# Altium PCB 电源板.PcbDoc
Units mm, origin at the board's own origin, x right, y up, seen from the top; angles counter-clockwise.
Board outline 72.29 x 60.99 mm, 2 copper layers (Top Layer, Bottom Layer), stack 1.18 mm thick; 16 components, 8 nets, 55 pads, 19 vias.
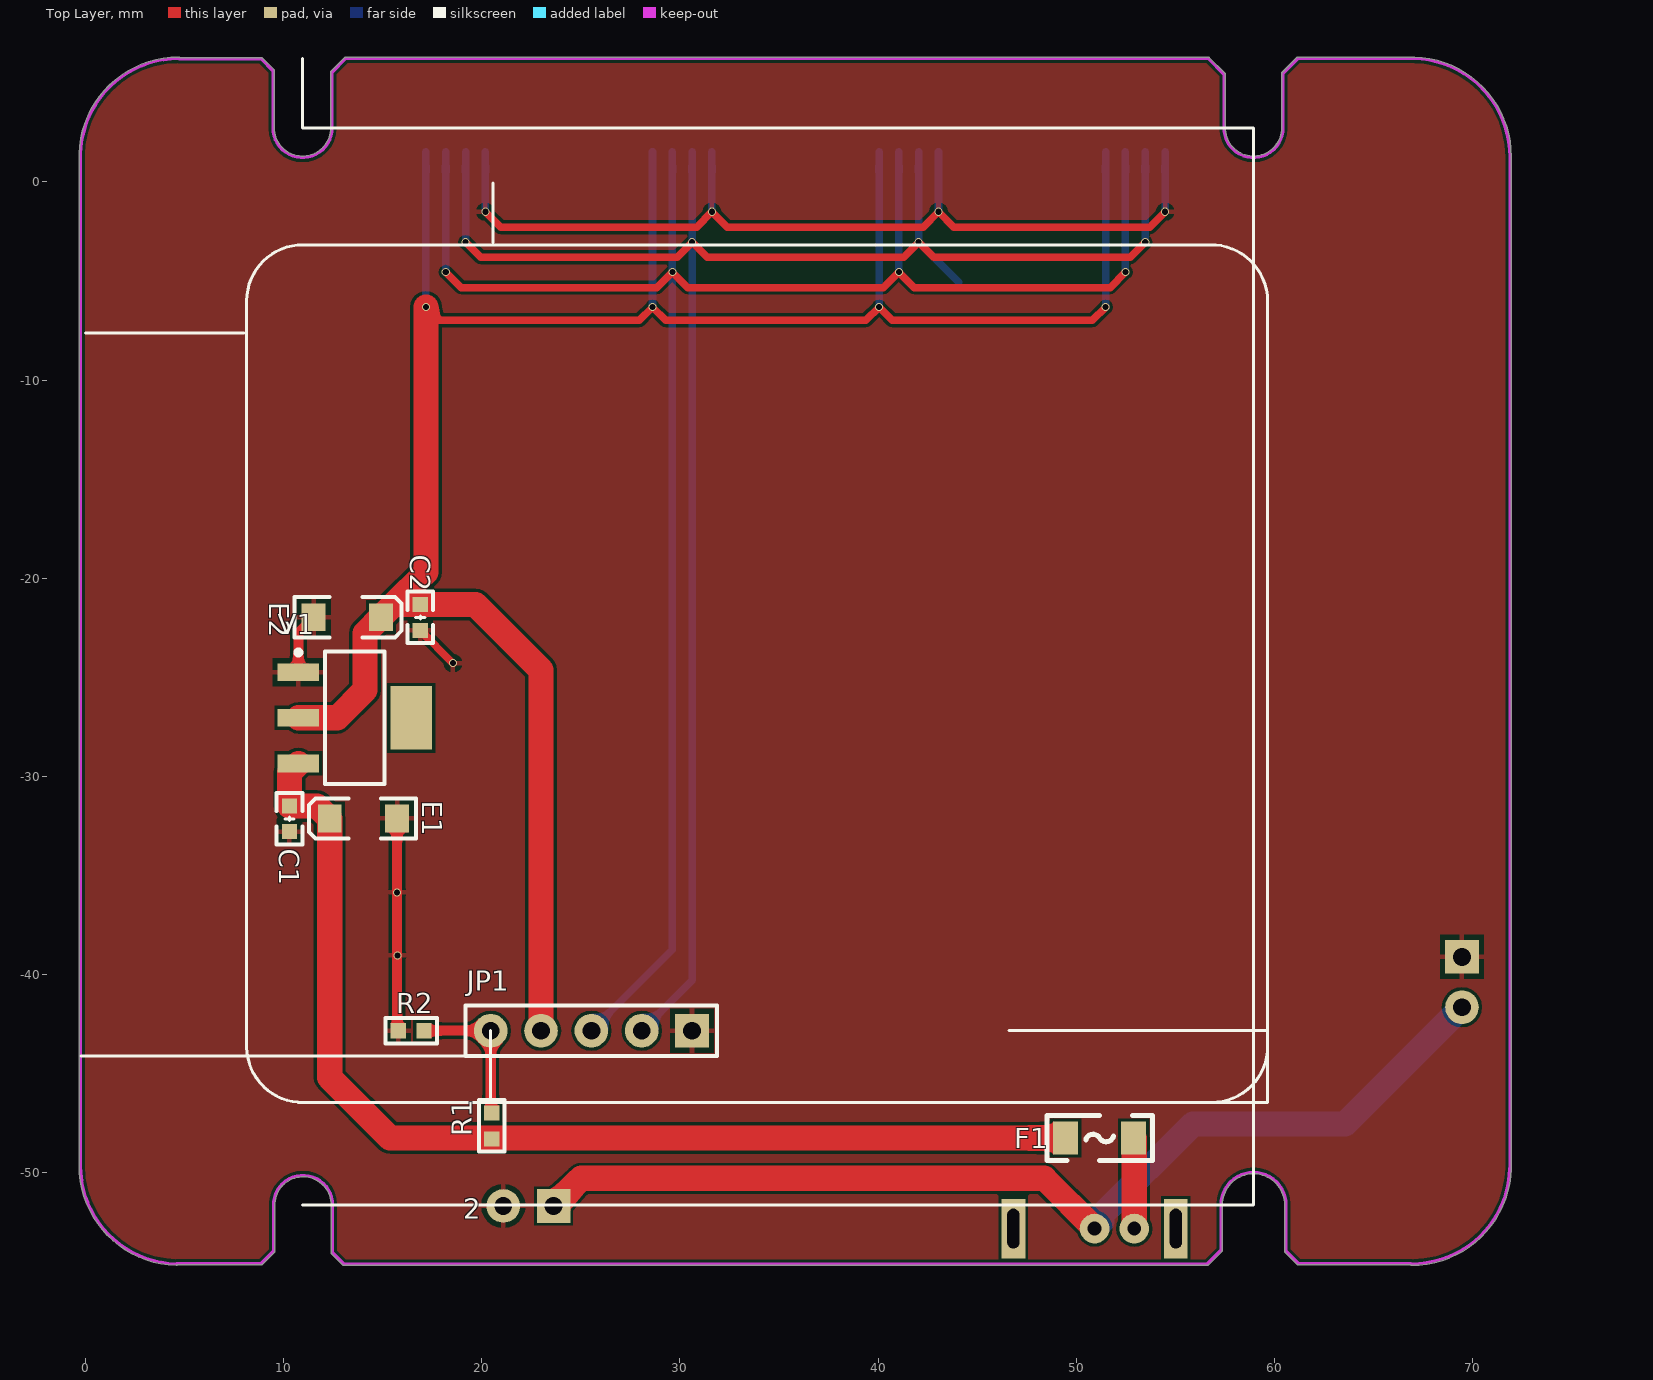
[diagram p0: Top Layer view]
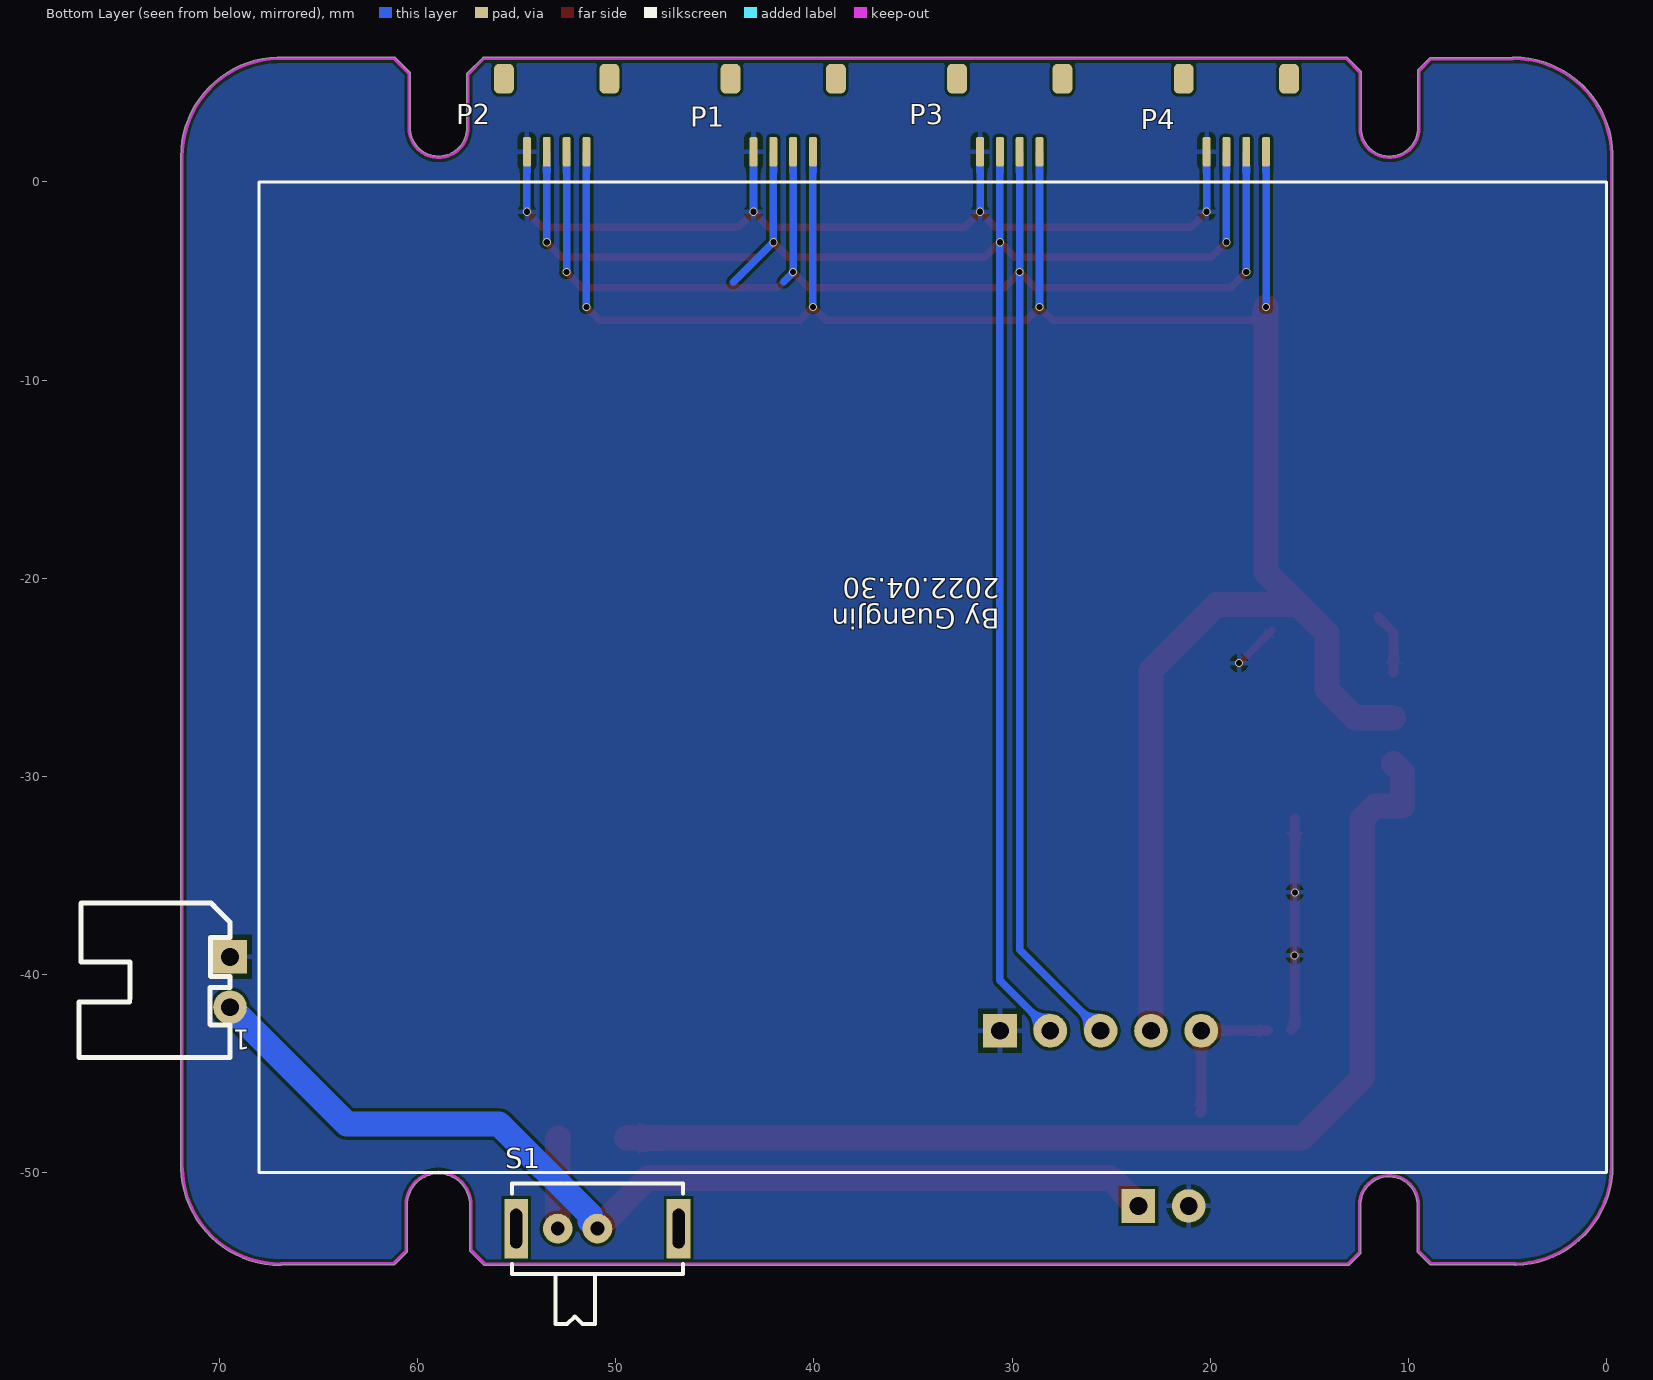
[diagram p1: Bottom Layer view, seen from below]

## Layer stack, top to bottom
Top Solder: solder mask 0.01, Solder Resist, Dk 3.5
Top Layer: signal copper 0.03
Dielectric 1: dielectric 1.12, FR-4, Dk 4.8
Bottom Layer: signal copper 0.03
Bottom Solder: solder mask 0.01, Solder Resist, Dk 3.5

## Board outline
4.57,-54.685 ccw(c4.572,-54.608) 4.628,-54.661 8.865,-54.661 ccw(c8.865,-54.585) 8.919,-54.638 8.919,-54.639 9.527,-54.03 9.527,-54.031 ccw(c9.473,-53.976) 9.55,-53.976 9.55,-51.668 ccw(c9.473,-51.668) 9.55,-51.667 cw(c10.973,-51.638) 12.396,-51.638 12.396,-54.053 ccw(c12.473,-54.053) 12.419,-54.107 12.976,-54.664 ccw(c13.03,-54.61) 13.03,-54.687 56.617,-54.687 ccw(c56.617,-54.61) 56.671,-54.664 57.351,-53.984 57.35,-53.985 ccw(c57.296,-53.93) 57.373,-53.93 57.373,-51.636 cw(c58.947,-51.636) 60.522,-51.636 60.522,-53.969 ccw(c60.598,-53.969) 60.545,-54.023 60.544,-54.023 61.16,-54.639 61.16,-54.638 ccw(c61.214,-54.585) 61.214,-54.661 66.872,-54.661 ccw(c66.929,-54.61) 66.929,-54.687 ccw(c66.929,-49.657) 71.956,-49.802 71.957,-49.802 ccw(c71.882,-49.784) 71.959,-49.784 71.959,1.269 71.959,1.27 ccw(c66.929,1.27) 67.064,6.298 ccw(c67.056,6.222) 67.056,6.298 61.187,6.298 ccw(c61.187,6.222) 61.133,6.275 61.133,6.276 60.393,5.536 60.394,5.536 ccw(c60.447,5.482) 60.371,5.482 60.371,2.723 cw(c58.947,2.723) 57.524,2.743 ccw(c57.448,2.744) 57.524,2.744 57.524,5.428 ccw(c57.448,5.428) 57.501,5.483 57.502,5.483 56.707,6.277 ccw(c56.653,6.223) 56.653,6.3 13.133,6.3 ccw(c13.133,6.223) 13.079,6.277 12.393,5.591 12.394,5.592 ccw(c12.447,5.537) 12.371,5.537 12.371,2.723 cw(c10.947,2.723) 9.524,2.723 9.524,5.615 ccw(c9.447,5.615) 9.501,5.669 9.502,5.669 8.917,6.253 8.918,6.253 ccw(c8.863,6.199) 8.863,6.276 4.755,6.276 ccw(c4.699,6.223) 4.699,6.3 ccw(c4.699,1.27) -0.328,1.415 -0.329,1.415 ccw(c-0.254,1.397) -0.331,1.397 -0.331,-49.656 -0.331,-49.657 cw(c-0.254,-49.657) -0.331,-49.656 -0.331,-49.657 ccw(c4.699,-49.657)

## Design rules (kind name [scope] priority, off if disabled: settings)
Clearance [All] p1: gap=0.152 ignorepadtopadclearanceinfootprint=FALSE
PolygonConnect [All] p1: connectstyle=Relief reliefconductorwidth=0.254 reliefentries=4 polygonreliefangle="90 Angle" airgapwidth=0.254
RoutingVias [All] p1: holewidth=0.711 width=1.27 viastyle="Through Hole" minholewidth=0.711 minwidth=1.27 maxholewidth=0.711 maxwidth=1.27
SolderMaskExpansion [All] p1: expansion=0.102
Width [All] p1: maxlimit=2.54 minlimit=0.254 preferedwidth=0.254
30 further rules are at their usual default settings.

## Components (designator, comment, footprint, x,y, rotation, side; value= is the part's Value field where it differs from the comment)
1 "HDR-1X2" XH2.54-WI-2P 69.469,-40.386 r270 bottom
2 "HDR-1X2" XH2.54-WI-2P 22.352,-51.689 r180 top
C1 "104" "C 0603_L" 10.287,-32.146 r90 top
C2 "104" "C 0603_L" 16.891,-21.986 r90 top
E1 "10uF/16V" "CD A(3216)" 14.019,-32.131 r0 top
E2 "10uF/16V" "CD A(3216)" 13.208,-21.971 r180 top
F1 "MSMD200-8V 1A" "FU 1206" 51.181,-48.26 r180 top
JP1 "HDR-1X5" HDR2.54-LI-5P 25.527,-42.844 r180 top
P1 "SH1.0-4P" SH1.0-4P 41.548,1.524 r0 bottom
P2 "SH1.0-4P" SH1.0-4P 52.983,1.524 r0 bottom
P3 "SH1.0-4P" SH1.0-4P 30.112,1.524 r0 bottom
P4 "SH1.0-4P" SH1.0-4P 18.677,1.524 r0 bottom
R1 "30K" "R 0603_L" 20.5,-47.65 r270 top
R2 "10K" "R 0603_L" 16.428,-42.844 r0 top
S1 "SS-12F23" SK-12D07VG3 50.927,-52.832 r180 bottom
V1 "AMS1117-5.0V" SOT223_L 13.589,-27.051 r0 top

## Footprints (in the part's own frame and the unit in brackets; to place one, negate y for a bottom-side part, rotate by r counter-clockwise, add the part's x,y. Pads: shape width x height; smd on the part's side, far side on the other; paste and mask are expansions set on the pad)
"C 0603_L" [mil] "无极性贴片电容                                       淘宝ID:黄晶宝石"
  rect 30x30 smd: 1(-25.59,0) 2(25.59,0)
  silkscreen extent -51,-26 51,26, body extent -31,-16 31,16, height 32
"CD A(3216)" [mm] "长3.2mm，宽1.6mm，厚1.6mm      淘宝ID:黄晶宝石"
  rect 1.2x1.4 smd: 1(-1.7,0) 2(1.7,0)
  silkscreen extent -2.74,-1.02 2.67,1.02, body extent -1.6,-0.8 1.6,0.8, height 1.6
"FU 1206" [mil] "贴片保险丝"
  rect 50x65 smd: 1(-67.5,0) 2(67.5,0)
  silkscreen extent -105,-45 105,45, body extent -63,-32 63,32, height 34
HDR2.54-LI-5P [mm] "排针，5脚"
  rect 1.7x1.7 hole 0.9: 1(-5.08,0)
  round 1.7 hole 0.9: 2(-2.54,0) 3(0,0) 4(2.54,0) 5(5.08,0)
  silkscreen extent -6.35,-1.27 6.35,1.27, body extent -6.35,-1.27 6.35,1.27, height 8.5
"R 0603_L" [mil] "1/10W贴片电阻                 淘宝ID:黄晶宝石"
  rect 30x30 smd: 1(-25.59,0) 2(25.59,0)
  silkscreen extent -51,-26 51,26, body extent -31,-16 32,16, height 16
SH1.0-4P [mm]
  rrect50% 0.4x1.5 smd: 1(-1.5,0) 2(-0.5,0) 3(0.5,0) 4(1.5,0)
  rrect50% 1x1.5 smd: SH1(-2.659,-3.683) SH2(2.659,-3.683)
  body extent -3,-4.42 3,0.54, height 3.14
SK-12D07VG3 [mm] "侧脚支架小型拨动开关"
  rect 1.2x3 hole 0.6 slot 2 at 90 deg unplated: 0(-4.1,0) 0(4.1,0)
  round 1.5 hole 0.7: 1(-2,0) 2(0,0)
  silkscreen extent -4.32,-4.83 4.32,2.29, body extent -4.3,-4.85 4.3,2.25, height 4.75
SOT223_L [mm] "SOT223, 4-Leads, Body 6.5x3.5mm, Pitch 2.3mm, Lead Span 7mm, IPC High Density"
  rect 2.1x0.9 smd: 1(-2.85,2.3) 2(-2.85,0) 3(-2.85,-2.3)
  rect 2.1x3.2 smd: 4(2.85,0)
  silkscreen extent -2.97,-3.35 1.5,3.42, body extent -1.85,-3.35 1.85,3.35, height 1.7
XH2.54-WI-2P [mm] "接插件，2P"
  rect 1.7x1.7 hole 0.9: 1(-1.27,0)
  round 1.7 hole 0.9: 2(1.27,0)
  silkscreen extent -3.99,-7.62 3.81,0, body extent -3.77,-7.35 3.77,0.35, height 5.73

## Part data
1 2: library part "Header 2", "2P接插件"
C1 C2: library part C, "贴片电容"
E1 E2: library part CT, "贴片钽电容"
F1: library part FU, "贴片保险丝"
JP1: library part "Header 5", "5P接插件"
R1 R2: library part R, "贴片电阻"
S1: library part SSW-1P, "1路波动开关"
V1: library part AMS1117, "三端稳压芯片", BOM名称=ÎÈÑ, 欢迎光临淘宝店铺=https://shop463601444.tao, 淘宝ID=封装库来自淘宝

## Via types
v1: diameter 0.406, hole 0.305, Top Layer to Bottom Layer, tented both sides, 19 vias

## Nets (pads, with @x,y where several pads share a name; then routed paths per layer and width w, separated by ;. In a path a pad name is that pad's centre, name@x,y a point inside that pad or via, vN(x,y) a via of type N, cw(c..) or ccw(c..) an arc to the next point about the centre after c; other vN are vias at no path point)
5V: C2.2 E2.1 JP1.4 P1.1 P2.1 P3.1 P4.1 V1.2 | length 118.9
  Top Layer w0.381: v1(17.177,-6.318) 17.844,-6.985 27.945,-6.985 v1(28.612,-6.318) 29.279,-6.985 39.381,-6.985 v1(40.048,-6.318) 40.715,-6.985 50.816,-6.985 v1(51.483,-6.318)
  Top Layer w1.27: V1.2 12.7,-27.051 14.097,-25.654 14.097,-22.782 E2.1 15.543,-21.336 ; v1(17.177,-6.318) 17.177,-19.702 15.543,-21.336 ; JP1.4 22.987,-24.638 19.685,-21.336 C2.2 15.543,-21.336
  Bottom Layer w0.381: v1(17.177,-6.318) P4.1 ; v1(28.612,-6.318) P3.1 ; v1(40.048,-6.318) P1.1 ; v1(51.483,-6.318) P2.1
7.4V: C1.2 E1.1 F1.2 R1.2 V1.3 | length 56.1
  Top Layer w1.27: V1.3 10.287,-29.803 C1.2 11.684,-31.496 E1.1 12.319,-45.212 15.367,-48.26 F1.2
CANH: JP1.3 P1.2 P2.2 P3.2 P4.2 | length 101.2
  Top Layer w0.381: v1(18.177,-4.556) 18.955,-5.334 28.834,-5.334 v1(29.612,-4.556) 30.39,-5.334 40.27,-5.334 v1(41.048,-4.556) 41.826,-5.334 51.705,-5.334 v1(52.483,-4.556)
  Bottom Layer w0.381: v1(18.177,-4.556) P4.2 ; JP1.3 29.612,-38.758 v1(29.612,-4.556) P3.2 ; P1.2 v1(41.048,-4.556) 41.529,-5.037 ; v1(52.483,-4.556) P2.2
CANL: JP1.2 P1.3 P2.3 P3.3 P4.3 | length 98.2
  Top Layer w0.381: v1(19.177,-3.048) 19.939,-3.81 29.85,-3.81 v1(30.612,-3.048) 31.374,-3.81 41.286,-3.81 v1(42.048,-3.048) 42.81,-3.81 52.721,-3.81 v1(53.483,-3.048)
  Bottom Layer w0.381: v1(19.177,-3.048) P4.3 ; JP1.2 30.612,-40.298 v1(30.612,-3.048) P3.3 ; P1.3 v1(42.048,-3.048) 44.069,-5.069 ; v1(53.483,-3.048) P2.3
GND: 1.1 2.2 C1.1 C2.1 E1.2 E2.2 JP1.1 P1.4 P2.4 P3.4 P4.4 R2.1 V1.1 | length 64.6
  Top Layer w0.381: C2.1 v1(18.542,-24.287) ; v1(20.177,-1.508) 20.955,-2.286 30.834,-2.286 v1(31.612,-1.508) 32.39,-2.286 42.27,-2.286 v1(43.048,-1.508) 43.826,-2.286 53.705,-2.286 v1(54.483,-1.508)
  Top Layer w0.508: V1.1 10.739,-22.74 E2.2 ; E1.2@15.733,-32.145 E1.2 15.719,-42.607 R2.1@15.911,-42.799
  Bottom Layer w0.381: v1(20.177,-1.508) P4.4 ; v1(31.612,-1.508) P3.4 ; v1(43.048,-1.508) P1.4 ; v1(54.483,-1.508) P2.4
  other v1: 15.733,-39.04 15.719,-35.865
Net1_2: 1.2 2.1 S1.2 | length 52.3
  Top Layer w1.27: 2.1 25.019,-50.292 48.387,-50.292 S1.2
  Bottom Layer w1.27: S1.2 51.288,-52.471 51.288,-52.153 55.892,-47.549 63.576,-47.549 1.2
NetF1_1: F1.1 S1.1 | length 4.6
  Top Layer w1.27: F1.1 52.927,-48.291 S1.1
PB0/ADC8: JP1.5 R1.1 R2.2 | length 7.6
  Top Layer w0.254: R2.2@17.033,-42.799 R2.2
  Top Layer w0.508: R2.2 JP1.5 20.447,-46.947 R1.1
pads on no net: P1.SH1 P1.SH2 P2.SH1 P2.SH2 P3.SH1 P3.SH2 P4.SH1 P4.SH2 S1.0 V1.4

## Polygon pours and split planes (outlines as drawn)
GND on Top Layer (solid, remove dead copper, pour order 12): -5.512,14.808 -3.404,12.7 87.351,12.7 87.351,-59.461 81.28,-65.532 80.569,-64.821 -10.897,-64.821
GND on Bottom Layer (solid, remove dead copper, pour order 14): -11.735,15.443 88.341,15.443 93.878,9.906 93.878,-69.545 -6.325,-69.545 -12.014,-63.856

## Keep-outs
Keep-Out Layer:
  lines w0.152: -0.254,1.397 -0.254,-49.657 ccw(c4.699,-49.657) 4.572,-54.608 ; -0.252,1.397 cw(c4.699,1.27) 4.699,6.223 ; 4.596,-54.585 8.865,-54.585 9.473,-53.976 9.473,-51.668 cw(c10.973,-51.638) 12.473,-51.638 12.473,-54.053 13.03,-54.61 56.617,-54.61 57.296,-53.93 57.296,-51.636 cw(c58.947,-51.636) 60.598,-51.636 60.598,-53.969 61.214,-54.585 66.904,-54.585 ; 4.723,6.199 8.863,6.199 9.447,5.615 9.447,2.723 ccw(c10.947,2.723) 12.447,2.723 12.447,5.537 13.133,6.223 56.653,6.223 57.448,5.428 57.448,2.744 ccw(c58.947,2.723) 60.447,2.723 60.447,5.482 61.187,6.222 67.056,6.222 cw(c66.929,1.27) 71.882,1.27 71.882,-49.784 ; 66.929,-54.61 ccw(c66.929,-49.657) 71.88,-49.784

## Silkscreen, mask and mechanical layers (free items; w line width, h text height)
Top Overlay:
  lines w0.152: -0.223,-44.114 19.185,-44.114 ; 0,-7.62 8,-7.62 ; 10.947,-51.636 58.947,-51.636 58.947,2.723 10.947,2.723 10.947,6.223 ; 20.447,-46.464 20.447,-42.844 ; 20.574,-3.048 20.574,-0.048 ; 34.2,-46.464 59.665,-46.464 59.665,-40.685 ; 46.609,-42.844 59.614,-42.844 ; 8.128,-43.682 ccw(c10.949,-43.643) 10.989,-46.464 56.84,-46.464 ccw(c56.84,-43.639) 59.665,-43.639 59.665,-6 ccw(c56.804,-6.035) 56.769,-3.175 10.978,-3.175 ccw(c10.963,-6.01) 8.128,-5.994 8.128,-43.682
Bottom Overlay:
  lines w0.152: 0,-50 0,0 68,0 68,-50 0,-50
  text "By GuangJin / 2022.04.30" at 30.607,-20.015 h1.02 r180
Drill Drawing:
  lines w0.152: -0.254,1.397 cw(c4.635,1.333) 4.699,6.223